# EAGLE board LEDdriverSFE (EAGLE 6.2)
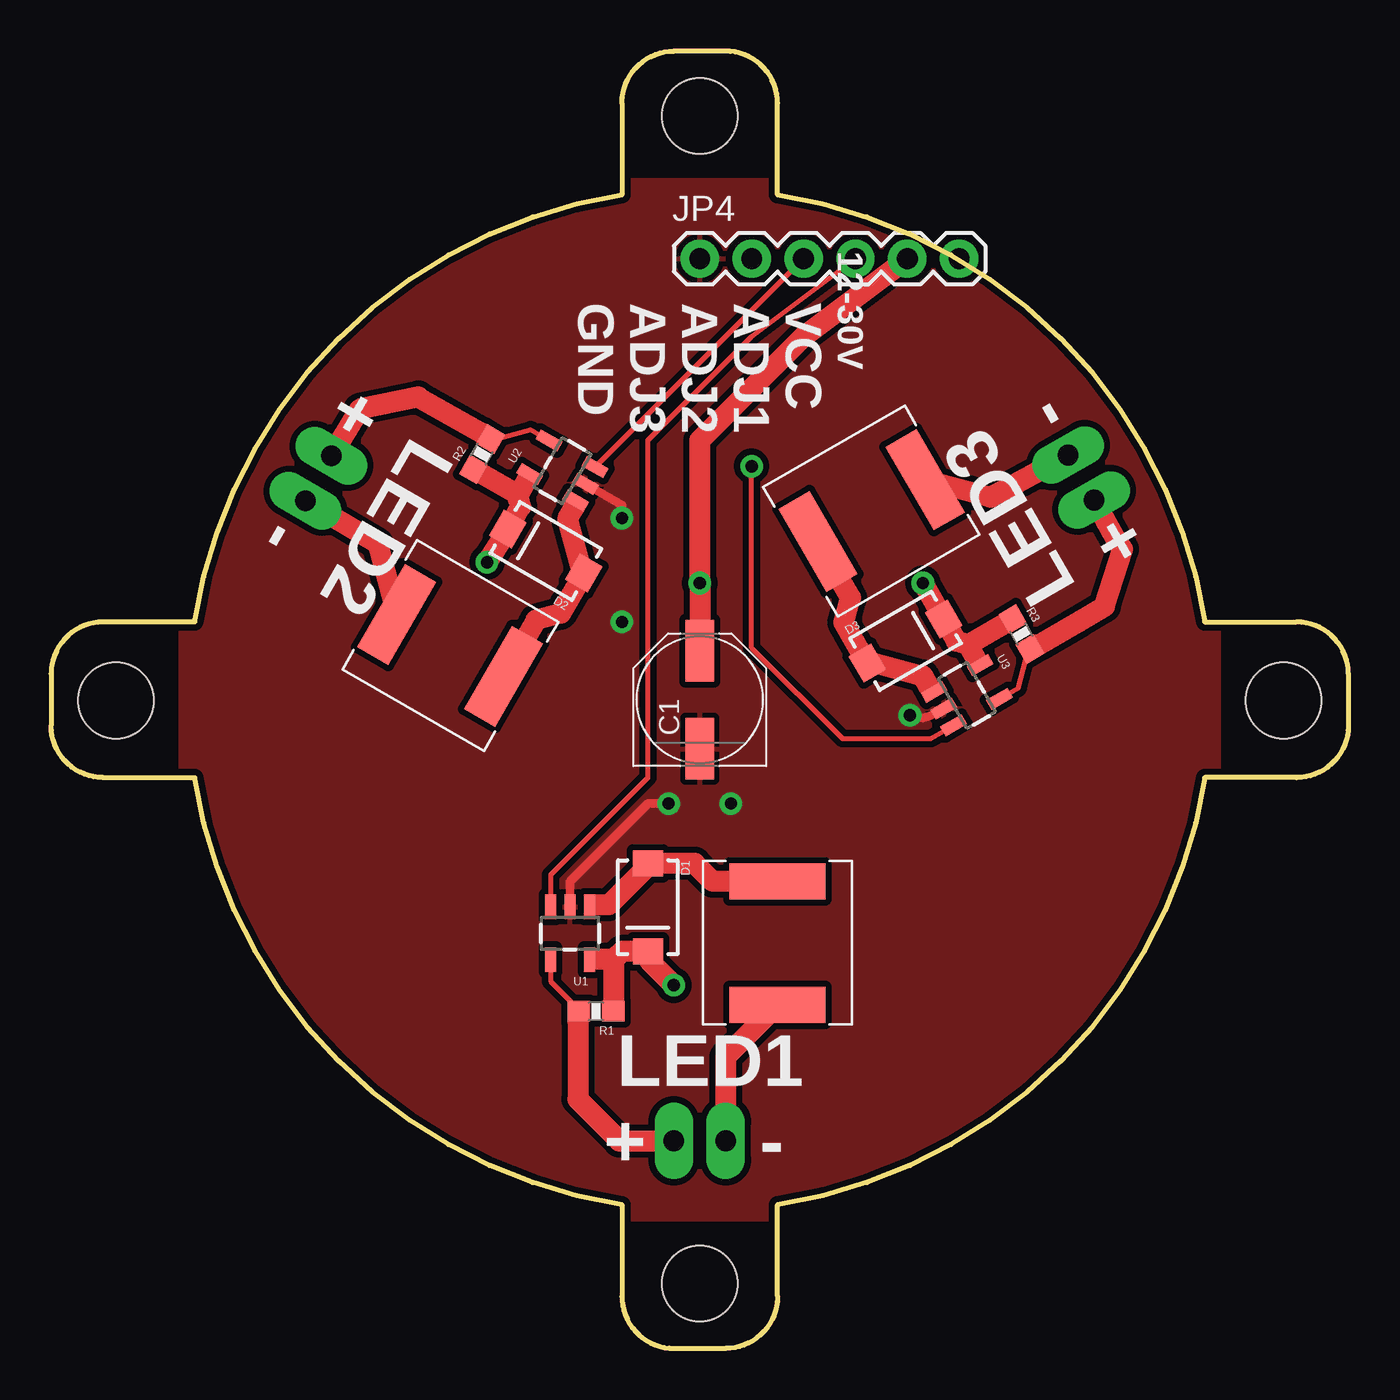
[diagram p0: board, top side]
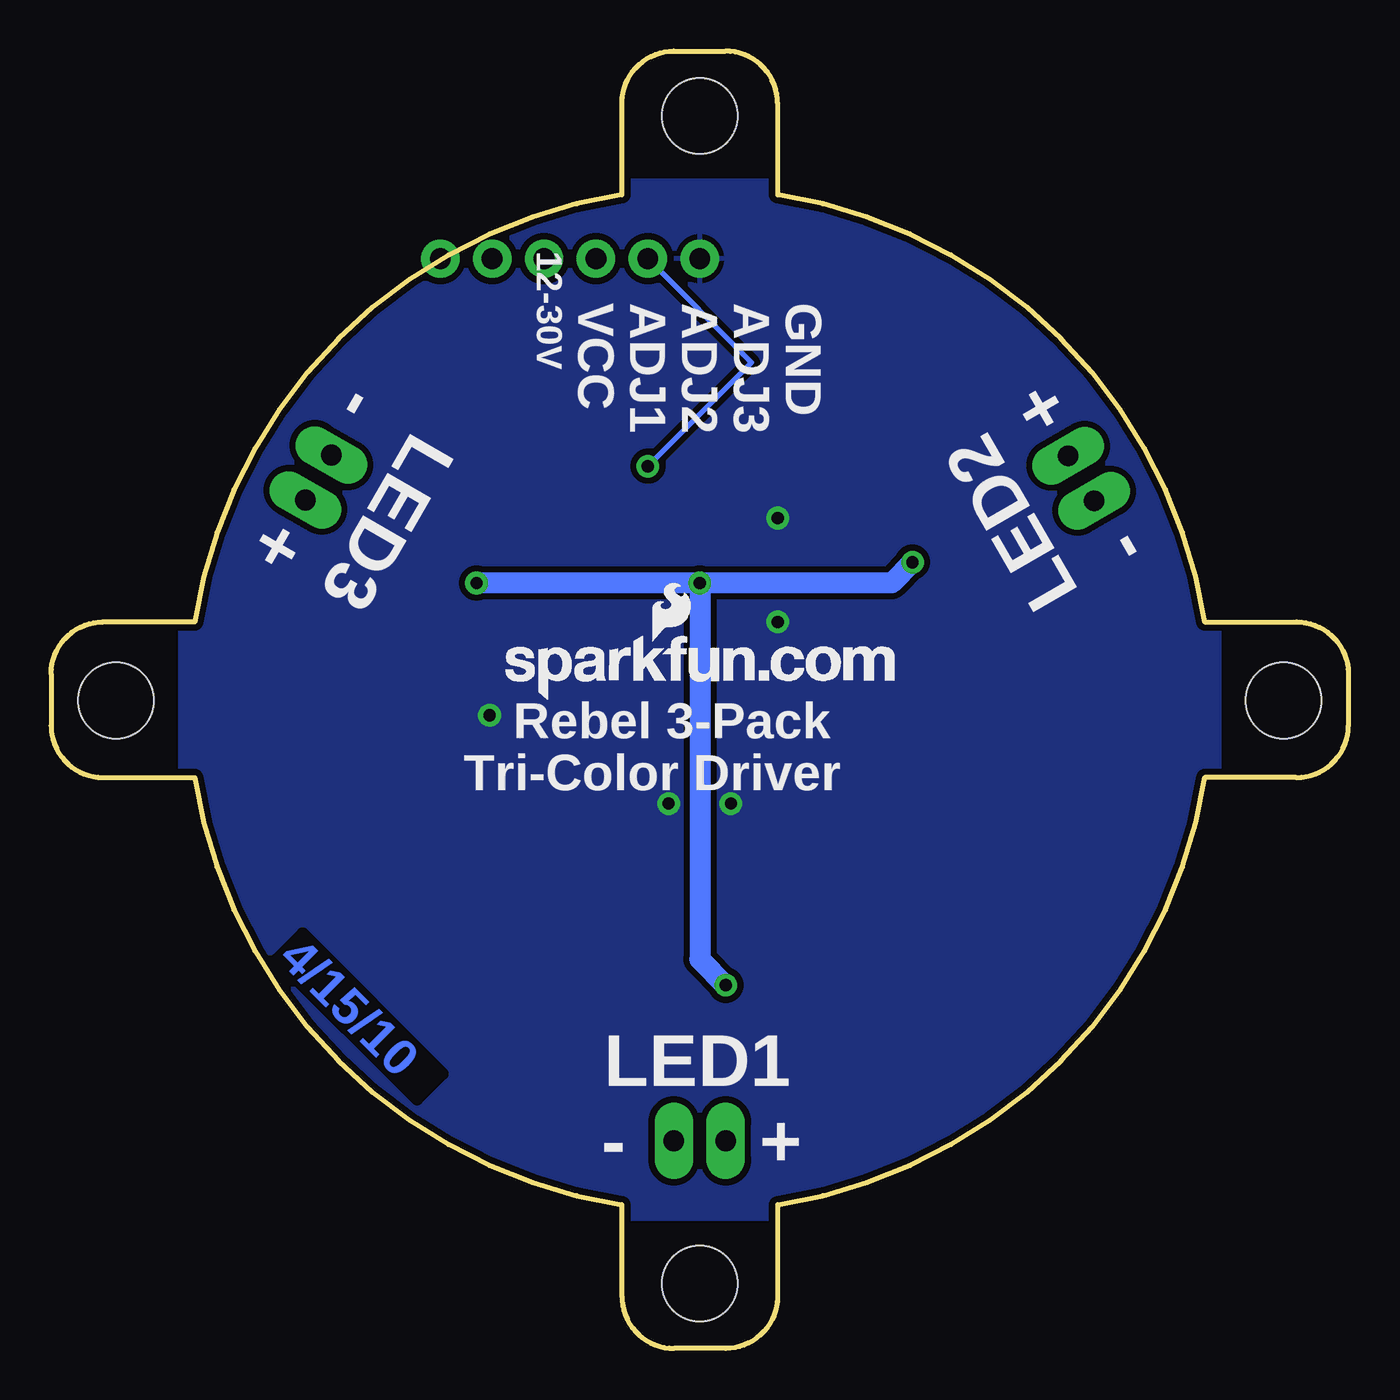
[diagram p1: board, bottom side, seen from below]

Size 63.5 x 63.5 mm. Coordinates in mm from the lower left corner, seen from the top.
Outline: 35.56,56.46 35.56,60.96 arc90 33.02,63.5 30.48,63.5 arc90 27.94,60.96 27.94,56.46 arc72 7.04,35.56 2.54,35.56 arc90 0,33.02 0,30.48 arc90 2.54,27.94 7.04,27.94 arc72 27.94,7.04 27.94,2.54 arc90 30.48,0 33.02,0 arc90 35.56,2.54 35.56,7.04 arc72 56.46,27.94 60.96,27.94 arc90 63.5,30.48 63.5,33.02 arc90 60.96,35.56 56.46,35.56 arc72 35.56,56.46
Copper layers (1*16): Top 0.035mm / dielectric 1.5mm / Bottom 0.035mm
Design rules: minimum track width 8mil, minimum drill 20mil, track to track 8mil, track to pad 8mil, pad to pad 8mil, via to via 8mil, smd to smd 8mil, copper to edge 8mil, drill to drill 8mil, minimum pad ring 12mil, minimum via ring 10mil, stop-mask expansion 4mil, vias tented up to drill 24mil, thermal gap 10mil
Holes 3.7 mm at 31.75,60.33 60.33,31.71 3.18,31.71 31.75,3.18

## Footprints (pad centres in the part's own frame; a part is rotated, then mirrored left to right if it is on the bottom)
PANASONIC_D = smd 3 x 1.4: + 2.4,0; - -2.4,0
SMA-DIODE = smd 1.27 x 1.47: A -2.15,0; C 2.15,0
1X02_LONGPADS = drill 1.016 pad 1.88 long: 1 0,0; 2 2.54,0
1X06 = drill 1.016 pad 1.88: 1 0,0; 2 2.54,0; 3 5.08,0; 4 7.62,0; 5 10.16,0; 6 12.7,0
CR75 = smd 1.75 x 4.7: P$1 0,0; P$2 6.05,0
0603-RES = smd 1.1 x 1: 1 -0.85,0; 2 0.85,0
SOT23-5 = smd 0.55 x 1.2: 1 -0.95,-1.3; 2 0,-1.3; 3 0.95,-1.3; 4 0.95,1.3; 5 -0.95,1.3

## Placement (x,y rotation side)
C1  47uF, 35V  [PANASONIC_D]  31.75,31.75 90 top
D1  MBRA140  [SMA-DIODE]  29.21,21.59 270 top
D2  MBRA140  [SMA-DIODE]  24.22,39.03 150 top
D3  MBRA140  [SMA-DIODE]  41.82,34.63 30 top
JP1  [1X02_LONGPADS]  30.48,10.16 0 top
JP2  [1X02_LONGPADS]  13.72,43.69 240 top
JP3  [1X02_LONGPADS]  51.05,41.53 120 top
JP4  [1X06]  31.75,53.34 0 top
JP5  LOGO-SFENEW  [SFE-NEW-WEBLOGO]  41.27,31.75 0 bottom
L1  68uH  [CR75]  35.56,22.86 270 top
L2  68uH  [CR75]  22.15,32.9 150 top
L3  68uH  [CR75]  37.54,39.49 30 top
R1  0.15  [0603-RES]  26.67,16.51 180 top
R2  0.15  [0603-RES]  21.09,43.77 60 top
R3  0.15  [0603-RES]  47.49,34.97 300 top
U1  ZXLD1360  [SOT23-5]  25.4,20.32 180 top
U2  ZXLD1360  [SOT23-5]  25.03,42.96 60 top
U3  ZXLD1360  [SOT23-5]  44.82,31.97 300 top

## Library data of the parts
C1 D1-D3 JP1-JP3 JP5 L1-L3 R1-R3 U1-U3 = SparkFun
JP4 = SparkFun-Connectors

## Nets
ADJ1: JP4.4 U1.3
ADJ2: JP4.3 U2.3
ADJ3: JP4.2 U3.3
GND: C1.- JP4.1 U1.2 U2.2 U3.2
N$1: JP1.2 L1.P$2
N$2: D2.A L2.P$1 U2.1
N$3: JP2.1 R2.2 U2.4
N$4: D1.A L1.P$1 U1.1
N$5: JP1.1 R1.2 U1.4
N$6: JP2.2 L2.P$2
N$7: D3.A L3.P$1 U3.1
N$8: JP3.1 R3.2 U3.4
N$9: JP3.2 L3.P$2
N$10: JP4.6
VIN: C1.+ D1.C D2.C D3.C JP4.5 R1.1 R2.1 R3.1 U1.5 U2.5 U3.5

## Tracks (layer width: path | path; a pad name or v marks a point on that pad's centre or on a via)
ADJ1
  Top 0.254: JP4.4 34.29,49.53 29.21,44.45 29.21,27.94 24.45,23.18 U1.3
ADJ2
  Top 0.254: U2.3 | U2.3 JP4.3
ADJ3  (via drill 0.6)
  Top 0.254: U3.3 43.05,29.84 38.73,29.84 34.29,34.29 v34.29,43.18
  Bottom 0.254: v34.29,43.18 29.21,48.26 JP4.2
GND  (via drill 0.6)
  Top 0.406: U3.2 43.05,30.99 42.67,30.86 v42.04,30.99 | U2.2 27.94,41.27 v27.94,40.64 | U1.2 25.4,22.86 29.21,26.67 v30.23,26.67
  other vias: 27.94,35.56 33.27,26.67
  pour Bottom (isolate 0.305): 6.35,6.35 57.15,6.35 57.15,57.15 6.35,57.15
  pour Top (isolate 0.305): 6.35,6.35 57.15,6.35 57.15,57.15 6.35,57.15
N$1
  Top 1.016: L1.P$2 33.02,14.27 JP1.2
N$2
  Top 0.406: 25.6,41.17 25.71,41.36 U2.1
  Top 1.016: L2.P$1 23.73,35.65 24.95,35.97 D2.A 25.98,38.01 25.28,40.62 25.6,41.17
N$3
  Top 0.254: R2.2 21.59,44.46 23.46,44.96 U2.4
  Top 0.406: 21.1,44.79 21.5,44.56 R2.2
  Top 1.016: 21.1,44.79 17.97,46.57 15.11,45.97 JP2.1
N$4
  Top 0.406: 26.67,21.72 26.45,21.72 U1.1
  Top 1.016: L1.P$1 32.38,22.86 31.5,23.75 D1.A 29.21,23.62 27.3,21.72 26.67,21.72
N$5
  Top 0.254: R1.2 25.82,16.6 24.45,17.97 U1.4
  Top 0.406: 25.78,16 25.78,16.47 R1.2
  Top 1.016: JP1.1 27.81,10.16 25.78,12.19 25.78,16
N$6
  Top 1.016: L2.P$2 15.98,39.39 JP2.2
N$7
  Top 0.406: 42.98,32.37 43.09,32.17 U3.1
  Top 1.016: L3.P$1 39.13,36.74 38.81,35.53 39.94,33.56 D3.A 40.06,33.61 42.66,32.92 42.98,32.37
N$8
  Top 0.254: R3.2 47.84,34.19 47.34,32.32 U3.4
  Top 0.406: 48.37,34.45 47.97,34.22 R3.2
  Top 1.016: 48.37,34.45 50.35,35.6 51.56,36.32 52.45,39.12 52.2,39.5 JP3.1
N$9
  Top 1.016: L3.P$2 45.99,41.66 | 45.99,41.66 46,41.72 | 45.99,41.66 JP3.2
VIN  (via drill 0.6)
  Top 0.406: 26.67,19.05 26.38,19.05 U1.5 | 23.29,42.5 23.44,42.75 U2.5 | 45.29,33.7 45.43,33.45 U3.5
  Top 1.016: 27.56,19.05 27.75,19.24 27.95,19.44 D1.C 29.33,19.56 29.33,18.93 v30.48,17.78 | 27.56,19.05 26.67,19.05 | R1.1 27.52,19.01 27.56,19.05 | 22.92,41.47 22.99,41.2 D2.C v21.34,38.48 | 22.92,41.47 22.85,41.73 23.29,42.5 | R2.1 22.83,41.78 22.92,41.47 | 44.58,34.54 44.31,34.61 D3.C v42.67,37.47 | 44.58,34.54 44.84,34.47 45.29,33.7 | R3.1 44.9,34.46 44.58,34.54 | JP4.5 36.83,49.53 31.75,44.45 v31.75,37.47 C1.+ 31.89,34.15
  Bottom 1.016: v31.75,37.47 v42.67,37.47 | v21.34,38.48 22.35,37.47 v31.75,37.47 | v30.48,17.78 31.75,19.05 v31.75,37.47

## Text on the board
Bottom: 4/15/10
tPlace: 12-30V | GND | ADJ3 | ADJ2 | ADJ1 | VCC | + | - | LED2 | - | + | LED3 | LED1 | + | -
bPlace: 12-30V | GND | ADJ3 | ADJ2 | ADJ1 | VCC | - | + | LED3 | + | - | LED2 | Rebel 3-Pack | Tri-Color Driver | LED1 | + | -